# EAGLE board SRAM 4MB 2048kbx8 CPLD proto (EAGLE 6.4), part 1 of 2
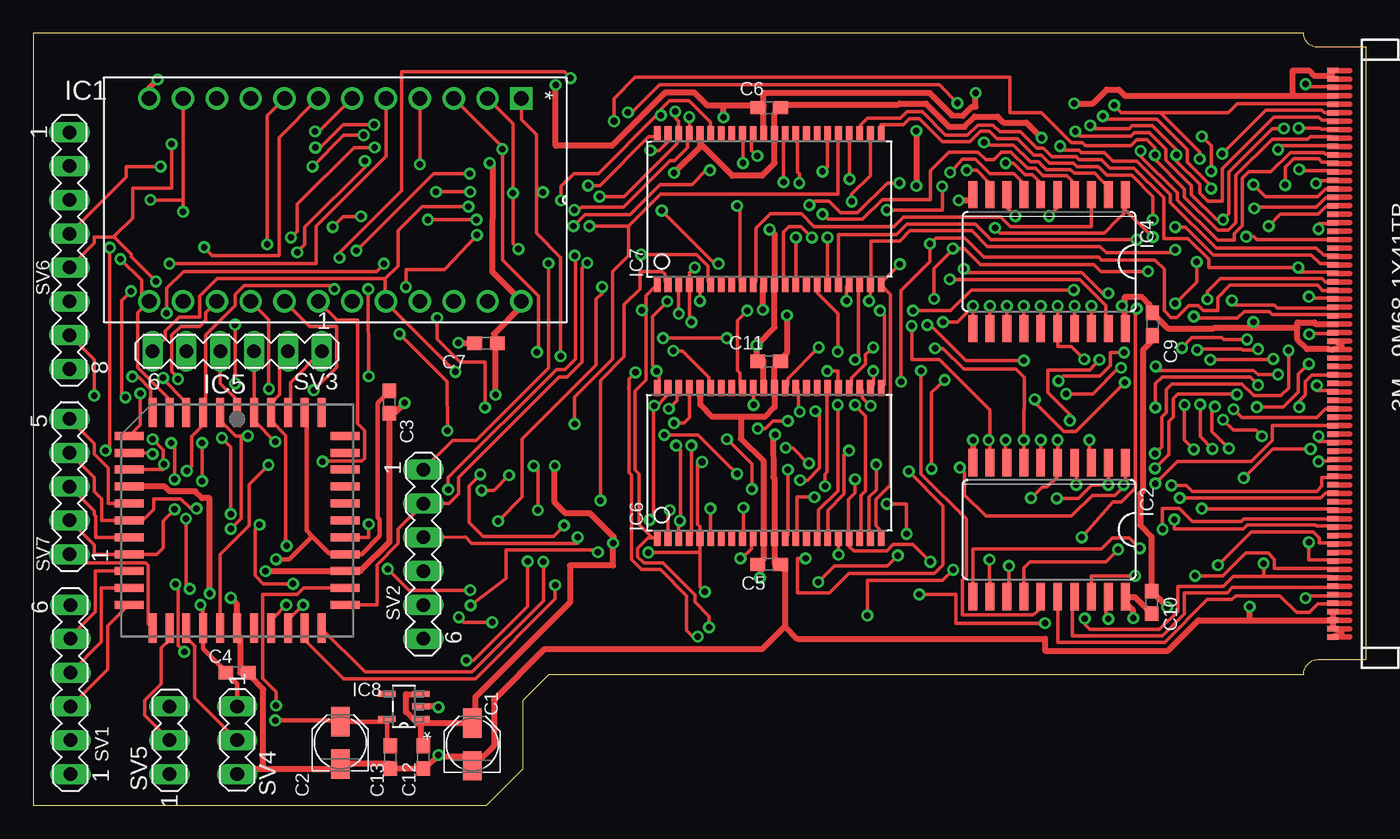
[diagram p0: board, top side]
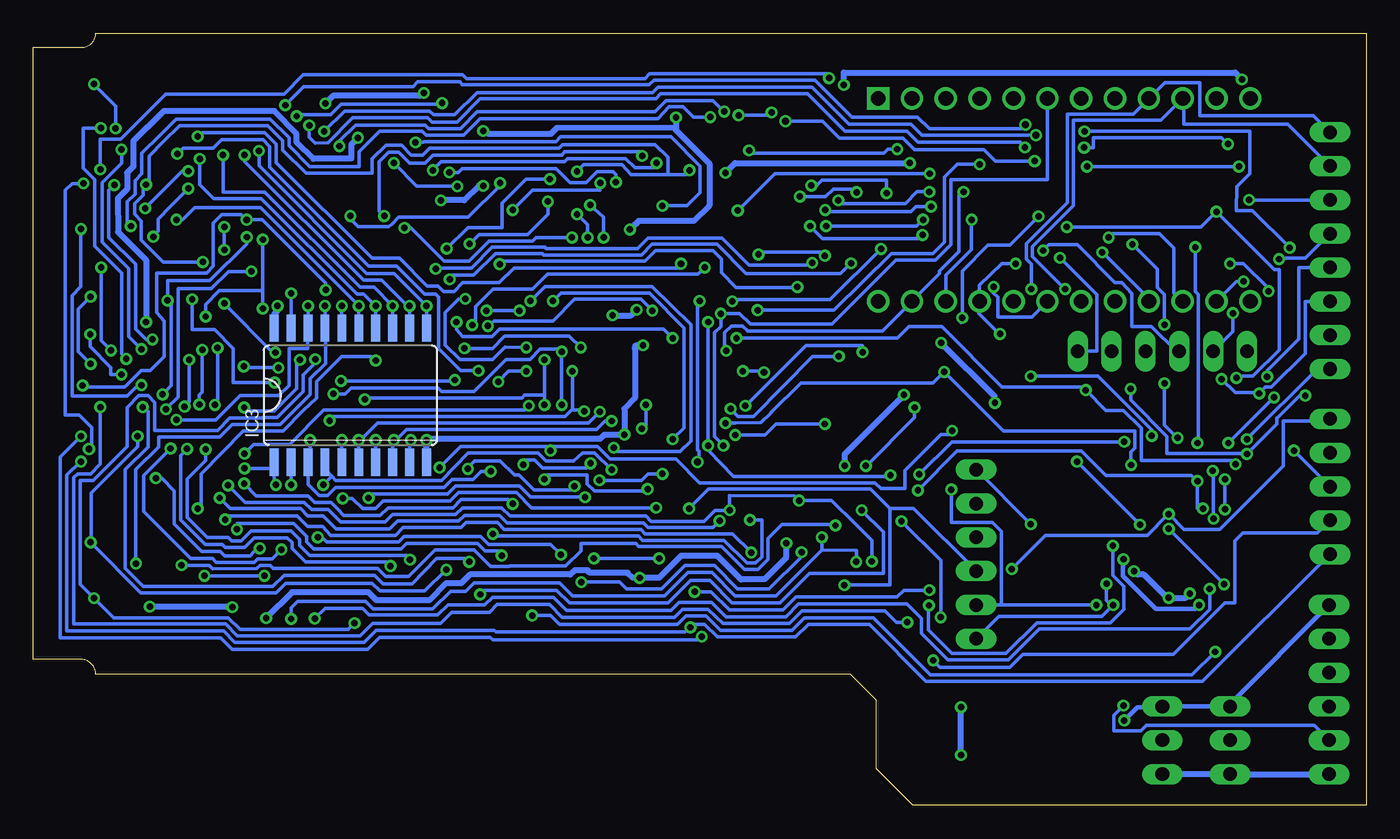
[diagram p1: board, bottom side, seen from below]

Size 100.06 x 57.98 mm. Coordinates in mm from the lower left corner, seen from the top.
Outline: 0,0 34.04,0 36.77,2.73 36.77,7.87 38.74,9.84 93.03,9.84 arc-90 93.06,9.84 95.38,9.84 arc-90 96.49,10.95 100.06,10.95 100.06,56.92 96.43,56.92 arc-90 95.38,57.98 0,57.97 0,0
Copper layers (1*16): Top 0.035mm / dielectric 1.5mm / Bottom 0.035mm
Design rules "default *": minimum track width 10mil, minimum drill 19mil, track to track 8mil, track to pad 8mil, pad to pad 8mil, via to via 8mil, smd to smd 8mil, copper to edge 40mil, drill to drill 8mil, minimum pad ring 10mil, minimum via ring 8mil, stop-mask expansion 4mil, vias tented up to drill 0mil, thermal gap 10mil
Net classes: 0 default: width 0.254 mm; 1 Ground: width 0.457 mm; 2 +5V: width 0.457 mm; 3 +3.3V: width 0.356 mm

## Footprints (pad centres in the part's own frame; a part is rotated, then mirrored left to right if it is on the bottom)
PANASONIC_B = smd 2.2 x 1.4: + 1.6,0; - -1.6,0
C0603 = smd 1.1 x 1: 1 -0.85,0; 2 0.85,0
DIP254P1524X965-24 = drill 1.118 square: 1 -15.24,27.94 | drill 1.118: 2 -15.24,25.4; 3 -15.24,22.86; 4 -15.24,20.32; 5 -15.24,17.78; 6 -15.24,15.24; 7 -15.24,12.7; 8 -15.24,10.16; 9 -15.24,7.62; 10 -15.24,5.08; 11 -15.24,2.54; 12 -15.24,0; 13 0,0; 14 0,2.54; 15 0,5.08; 16 0,7.62; 17 0,10.16; 18 0,12.7; 19 0,15.24; 20 0,17.78; 21 0,20.32; 22 0,22.86; 23 0,25.4; 24 0,27.94
SO20W = smd 0.66 x 2.032: 1 -5.715,-5.029; 2 -4.445,-5.029; 3 -3.175,-5.029; 4 -1.905,-5.029; 5 -0.635,-5.029; 6 0.635,-5.029; 7 1.905,-5.029; 8 3.175,-5.029; 9 4.445,-5.029; 10 5.715,-5.029; 11 5.715,5.029; 12 4.445,5.029; 13 3.175,5.029; 14 1.905,5.029; 15 0.635,5.029; 16 -0.635,5.029; 17 -1.905,5.029; 18 -3.175,5.029; 19 -4.445,5.029; 20 -5.715,5.029
PLCC44 = smd 0.6 x 2.2: 1 0,8.1; 2 -1.27,8.1; 3 -2.54,8.1; 4 -3.81,8.1; 5 -5.08,8.1; 6 -6.35,8.1; 18 -6.35,-8.1; 19 -5.08,-8.1; 20 -3.81,-8.1; 21 -2.54,-8.1; 22 -1.27,-8.1; 23 0,-8.1; 24 1.27,-8.1; 25 2.54,-8.1; 26 3.81,-8.1; 27 5.08,-8.1; 28 6.35,-8.1; 40 6.35,8.1; 41 5.08,8.1; 42 3.81,8.1; 43 2.54,8.1; 44 1.27,8.1 | smd 2.2 x 0.6: 7 -8.1,6.35; 8 -8.1,5.08; 9 -8.1,3.81; 10 -8.1,2.54; 11 -8.1,1.27; 12 -8.1,0; 13 -8.1,-1.27; 14 -8.1,-2.54; 15 -8.1,-3.81; 16 -8.1,-5.08; 17 -8.1,-6.35; 29 8.1,-6.35; 30 8.1,-5.08; 31 8.1,-3.81; 32 8.1,-2.54; 33 8.1,-1.27; 34 8.1,0; 35 8.1,1.27; 36 8.1,2.54; 37 8.1,3.81; 38 8.1,5.08; 39 8.1,6.35
TSOPII-Z44 = smd 0.5 x 1.2: 1 -8.4,-5.627; 2 -7.6,-5.627; 3 -6.8,-5.627; 4 -6,-5.627; 5 -5.2,-5.627; 6 -4.4,-5.627; 7 -3.6,-5.627; 8 -2.8,-5.627; 9 -2,-5.627; 10 -1.2,-5.627; 11 -0.4,-5.627; 12 0.4,-5.627; 13 1.2,-5.627; 14 2,-5.627; 15 2.8,-5.627; 16 3.6,-5.627; 17 4.4,-5.627; 18 5.2,-5.627; 19 6,-5.627; 20 6.8,-5.627; 21 7.6,-5.627; 22 8.4,-5.627; 23 8.4,5.627; 24 7.6,5.627; 25 6.8,5.627; 26 6,5.627; 27 5.2,5.627; 28 4.4,5.627; 29 3.6,5.627; 30 2.8,5.627; 31 2,5.627; 32 1.2,5.627; 33 0.4,5.627; 34 -0.4,5.627; 35 -1.2,5.627; 36 -2,5.627; 37 -2.8,5.627; 38 -3.6,5.627; 39 -4.4,5.627; 40 -5.2,5.627; 41 -6,5.627; 42 -6.8,5.627; 43 -7.6,5.627; 44 -8.4,5.627
SOT95P275X110-5N = smd 1.321 x 0.457: 1 -1.27,0.94; 2 -1.27,0; 3 -1.27,-0.94; 4 1.27,-0.94; 5 1.27,0.94
MA06-1 = drill 1.016 long: 1 -6.35,0; 2 -3.81,0; 3 -1.27,0; 4 1.27,0; 5 3.81,0; 6 6.35,0
MA03-1 = drill 1.016 long: 1 -2.54,0; 2 0,0; 3 2.54,0
MA08-1 = drill 1.016 long: 1 -8.89,0; 2 -6.35,0; 3 -3.81,0; 4 -1.27,0; 5 1.27,0; 6 3.81,0; 7 6.35,0; 8 8.89,0
MA05-1 = drill 1.016 long: 1 -5.08,0; 2 -2.54,0; 3 0,0; 4 2.54,0; 5 5.08,0
9M681X04 = smd 0.406 x 0.813: 1 -20.955,-3.81; 2 -19.685,-3.81; 3 -18.415,-3.81; 4 -17.145,-3.81; 5 -15.875,-3.81; 6 -14.605,-3.81; 7 -13.335,-3.81; 8 -12.065,-3.81; 9 -10.795,-3.81; 10 -9.525,-3.81; 11 -8.255,-3.81; 12 -6.985,-3.81; 13 -5.715,-3.81; 14 -4.445,-3.81; 15 -3.175,-3.81; 16 -1.905,-3.81; 17 -0.635,-3.81; 18 0.635,-3.81; 19 1.905,-3.81; 20 3.175,-3.81; 21 4.445,-3.81; 22 5.715,-3.81; 23 6.985,-3.81; 24 8.255,-3.81; 25 9.525,-3.81; 26 10.795,-3.81; 27 12.065,-3.81; 28 13.335,-3.81; 29 14.605,-3.81; 30 15.875,-3.81; 31 17.145,-3.81; 32 18.415,-3.81; 33 19.685,-3.81; 34 20.955,-3.81; 35 -20.32,-3.81; 36 -19.05,-3.81; 37 -17.78,-3.81; 38 -16.51,-3.81; 39 -15.24,-3.81; 40 -13.97,-3.81; 41 -12.7,-3.81; 42 -11.43,-3.81; 43 -10.16,-3.81; 44 -8.89,-3.81; 45 -7.62,-3.81; 46 -6.35,-3.81; 47 -5.08,-3.81; 48 -3.81,-3.81; 49 -2.54,-3.81; 50 -1.27,-3.81; 51 0,-3.81; 52 1.27,-3.81; 53 2.54,-3.81; 54 3.81,-3.81; 55 5.08,-3.81; 56 6.35,-3.81; 57 7.62,-3.81; 58 8.89,-3.81; 59 10.16,-3.81; 60 11.43,-3.81; 61 12.7,-3.81; 62 13.97,-3.81; 63 15.24,-3.81; 64 16.51,-3.81; 65 17.78,-3.81; 66 19.05,-3.81; 67 20.32,-3.81; 68 21.59,-3.81

## Placement (x,y rotation side)
C1  1uF/6,3V  [PANASONIC_B]  32.96,4.57 90 top
C2  1uF/6,3V  [PANASONIC_B]  23.05,4.7 90 top
C3  0,1uF  [C0603]  26.73,30.29 270 top
C4  0,1uF  [C0603]  15.3,9.97 0 top
C5  0,1uF  [C0603]  55.24,18.1 0 top
C6  0,1uF  [C0603]  55.24,52.39 180 top
C7  0,1uF  [C0603]  33.97,34.7 180 top
C9  0,1uF  [C0603]  84.01,36.13 270 top
C10  0,1uF  [C0603]  83.95,15.24 90 top
C11  0,1uF  [C0603]  55.24,33.34 180 top
C12  0,1uF  [C0603]  29.27,3.62 270 top
C13  0,1uF  [C0603]  26.8,3.62 270 top
IC1  M48Z02-70PC1  [DIP254P1524X965-24]  8.7,37.85 270 top
IC2  74LS245DW  [SO20W]  76.26,20.7 180 top
IC3  74LS245DW  [SO20W]  76.26,30.8 0 bottom
IC4  74LS245DW  [SO20W]  76.26,40.83 180 top
IC5  XC9536_44PLCC  [PLCC44]  15.3,21.4 0 top
IC6  BS62LV1600EIP55-10ZSXI  [TSOPII-Z44]  55.24,25.72 0 top
IC7  BS62LV1600EIP55-10ZSXI  [TSOPII-Z44]  55.24,44.77 0 top
IC8  LD6815TD/33H  [SOT95P275X110-5N]  27.81,7.43 180 top
SV1  JTAG  [MA06-1]  2.78,8.7 90 top
SV2  [MA06-1]  29.27,18.86 270 top
SV3  [MA06-1]  15.3,34.1 180 top
SV4  RAM/DISK  [MA03-1]  15.3,4.89 270 top
SV5  ROM IN/OUT  [MA03-1]  10.22,4.89 90 top
SV6  [MA08-1]  2.72,41.66 270 top
SV7  [MA05-1]  2.72,23.94 90 top
X1  PCMCIA female  [9M681X04]  101.36,34.23 270 top

## Library data of the parts
C1-C7 C9-C13 = resistor
IC1 = ST Microelctronics_By_element14_Batch_1; MPN: M48Z02-70PC1; OC_FARNELL: 9755748; OC_NEWARK: 89K1473; PACKAGE: PDIP-24; SUPPLIER: STMICROELECTRONICS
IC2-IC4 = 74xx-us
IC5 = xilinx-xc9; MPN: XC9536-15PCG44C; OC_FARNELL: 1193226; OC_NEWARK: 98K3376
IC6 IC7 = BSI_By_element14_Batch_1
IC8 = NXP; MPN: LD6815TD/33H; OC_FARNELL: 2308302; OC_NEWARK: 69W9575; PACKAGE: TSOP-5; SUPPLIER: NXP
SV1-SV7 = con-lstb; OC_FARNELL: unknown; OC_NEWARK: unknown
X1 = 3M

## Nets
+3V3 [+3.3V]: C2.+ C3.1 C4.1 C13.1 IC5.21 IC5.32 IC5.41 IC8.5 SV1.6 SV4.1 SV5.3
+5V [+5V]: C1.+ C5.1 C6.1 C7.1 C9.1 C10.1 C11.1 C12.1 IC1.24 IC2.20 IC3.20 IC4.20 IC6.11 IC6.33 IC6.40 IC7.11 IC7.33 IC7.40 IC8.1 IC8.3 X1.16 X1.17 X1.51
A0: IC5.44 SV3.3 X1.29
A1: IC1.8 IC5.11 IC6.5 IC7.5 SV7.5 X1.28
A2: IC1.7 IC5.12 IC6.4 IC7.4 SV7.4 X1.27
A3: IC1.6 IC5.13 IC6.3 IC7.3 SV7.3 X1.26
A4: IC1.5 IC5.14 IC6.2 IC7.2 SV7.2 X1.25
A5: IC1.4 IC5.18 IC6.1 IC7.1 SV7.1 X1.24
A6: IC1.2 IC6.44 IC7.44 X1.23
A7: IC1.3 IC6.43 IC7.43 X1.22
A8: IC1.1 IC6.42 IC7.42 X1.12
A9: IC1.23 IC6.39 IC7.39 X1.11
A10: IC1.22 IC6.28 IC7.28 X1.8
A11: IC1.19 IC6.27 IC7.27 X1.10
A12: IC6.26 IC7.26 X1.21
A13: IC6.25 IC7.25 X1.13
A14: IC6.24 IC7.24 X1.14
A15: IC6.23 IC7.23 X1.20
A16: IC6.22 IC7.22 X1.19
A17: IC6.21 IC7.21 X1.46
A18: IC6.20 IC7.20 X1.47
A19: IC6.19 IC7.19 X1.48
A20: IC6.18 IC7.18 X1.49
A21: IC6.16 IC7.16 X1.50
CE1#: IC5.42 SV3.1 X1.7
CE2#: IC5.1 SV3.4 X1.42
CE_ATT#: IC1.18 IC5.25 SV2.6
CE_LOW#: IC5.26 IC7.6 SV2.5
CE_UPP#: IC5.27 IC6.6 SV2.4
D0: IC1.9 IC3.18 IC4.18 IC5.2 SV6.1 X1.30
D1: IC1.10 IC3.17 IC4.17 IC5.3 SV6.2 X1.31
D2: IC1.11 IC3.16 IC4.16 IC5.4 SV6.3 X1.32
D3: IC1.13 IC3.15 IC4.15 IC5.5 SV6.4 X1.2
D4: IC1.14 IC3.14 IC4.14 IC5.6 SV6.5 X1.3
D5: IC1.15 IC3.13 IC4.13 IC5.7 SV6.6 X1.4
D6: IC1.16 IC3.12 IC4.12 IC5.8 SV6.7 X1.5
D7: IC1.17 IC3.11 IC4.11 IC5.9 SV6.8 X1.6
D8: IC2.18 X1.64
D9: IC2.17 X1.65
D10: IC2.16 X1.66
D11: IC2.15 X1.37
D12: IC2.14 X1.38
D13: IC2.13 X1.39
D14: IC2.12 X1.40
D15: IC2.11 X1.41
DO0: IC4.2 IC7.9
DO1: IC4.3 IC7.10
DO2: IC4.4 IC7.13
DO3: IC4.5 IC7.14
DO4: IC4.6 IC7.31
DO5: IC4.7 IC7.32
DO6: IC4.8 IC7.35
DO7: IC4.9 IC7.36
DO8: IC2.2 IC3.2 IC6.9
DO9: IC2.3 IC3.3 IC6.10
DO10: IC2.4 IC3.4 IC6.13
DO11: IC2.5 IC3.5 IC6.14
DO12: IC2.6 IC3.6 IC6.31
DO13: IC2.7 IC3.7 IC6.32
DO14: IC2.8 IC3.8 IC6.35
DO15: IC2.9 IC3.9 IC6.36
GND [Ground]: C1.- C2.- C3.2 C4.2 C5.2 C6.2 C7.2 C9.2 C10.2 C11.2 C12.2 C13.2 IC1.12 IC2.10 IC3.10 IC4.10 IC5.10 IC5.23 IC5.31 IC6.12 IC6.34 IC7.12 IC7.34 IC8.2 SV1.1 SV4.3 SV5.1 X1.1 X1.33 X1.34 X1.35 X1.36 X1.67 X1.68
N$1: IC5.30 SV1.2
N$2: IC5.17 SV1.3
N$3: IC5.16 SV1.4
N$4: IC5.15 SV1.5
N$7: IC5.19 SV5.2
N$8: IC5.20 SV4.2
OE: IC1.20 IC5.22 IC6.41 IC7.41 SV3.6 X1.9
OE_EVEN: IC4.19 IC5.33 SV2.1
OE_ODD: IC2.19 IC5.28 SV2.3
OE_ODD_LOW: IC3.19 IC5.29 SV2.2
REG#: IC5.43 SV3.2 X1.61
WE: IC1.21 IC2.1 IC3.1 IC4.1 IC6.17 IC7.17 SV3.5 X1.15